# Altium PCB MCU_PCB.PcbDoc
Units mm, origin at the board's own origin, x right, y up, seen from the top; angles counter-clockwise.
Board outline 70.36 x 37.85 mm, 2 copper layers (Top Layer, Bottom Layer), stack 1.671 mm thick; 32 components, 25 nets, 136 pads, 170 vias.
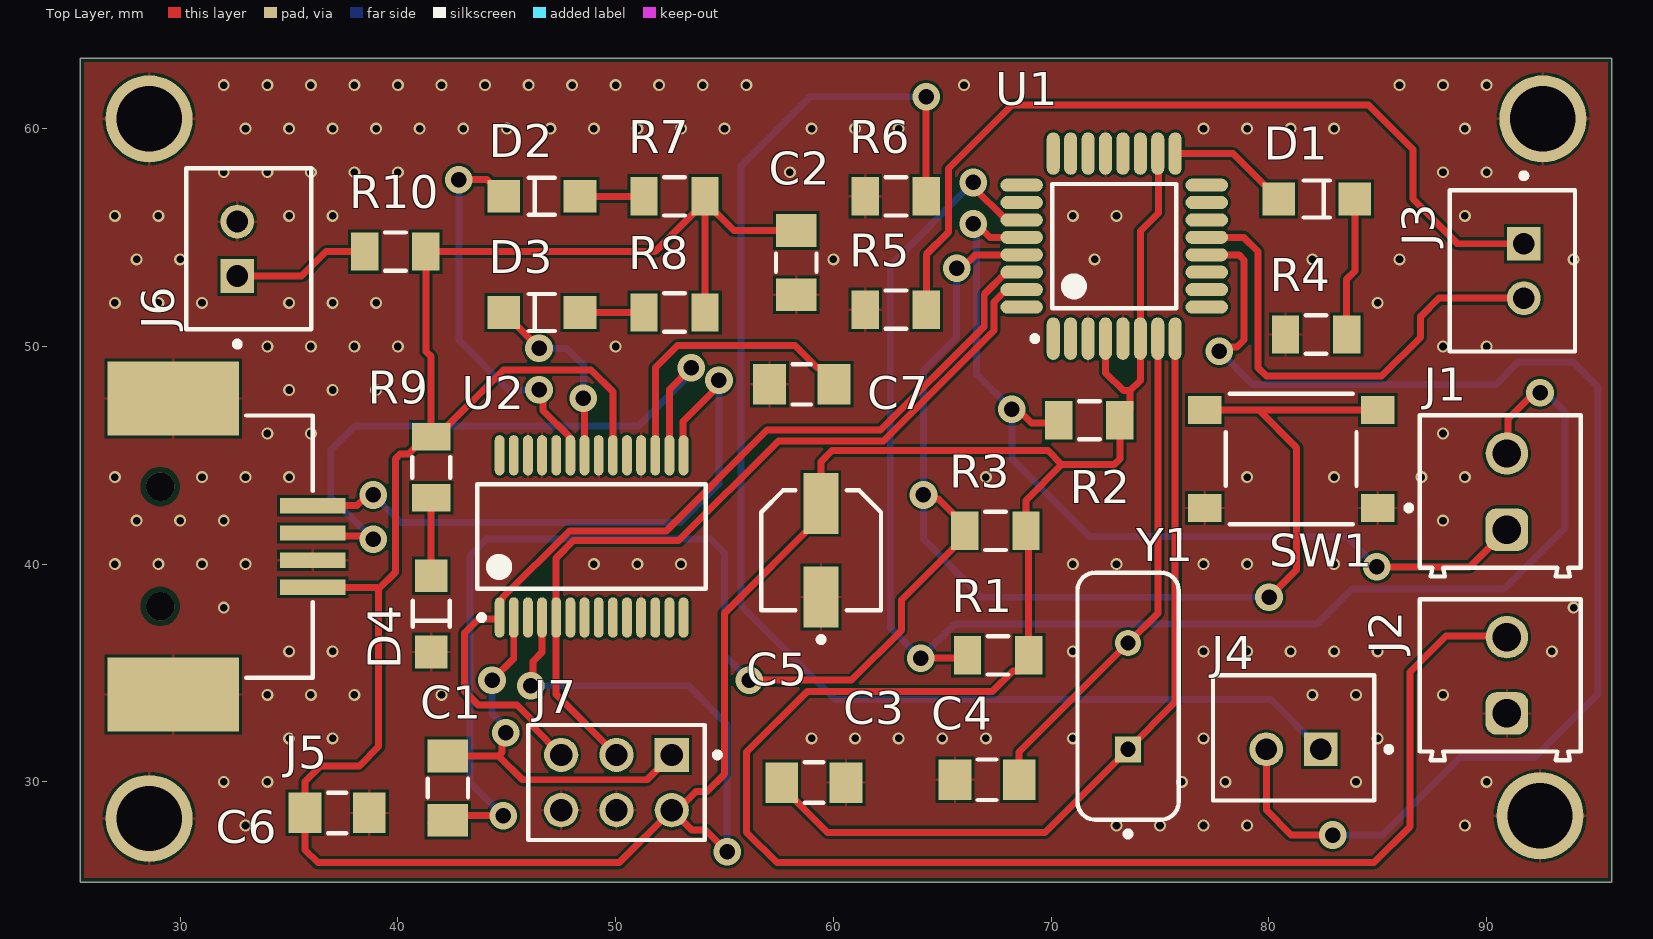
[diagram p0: Top Layer view]
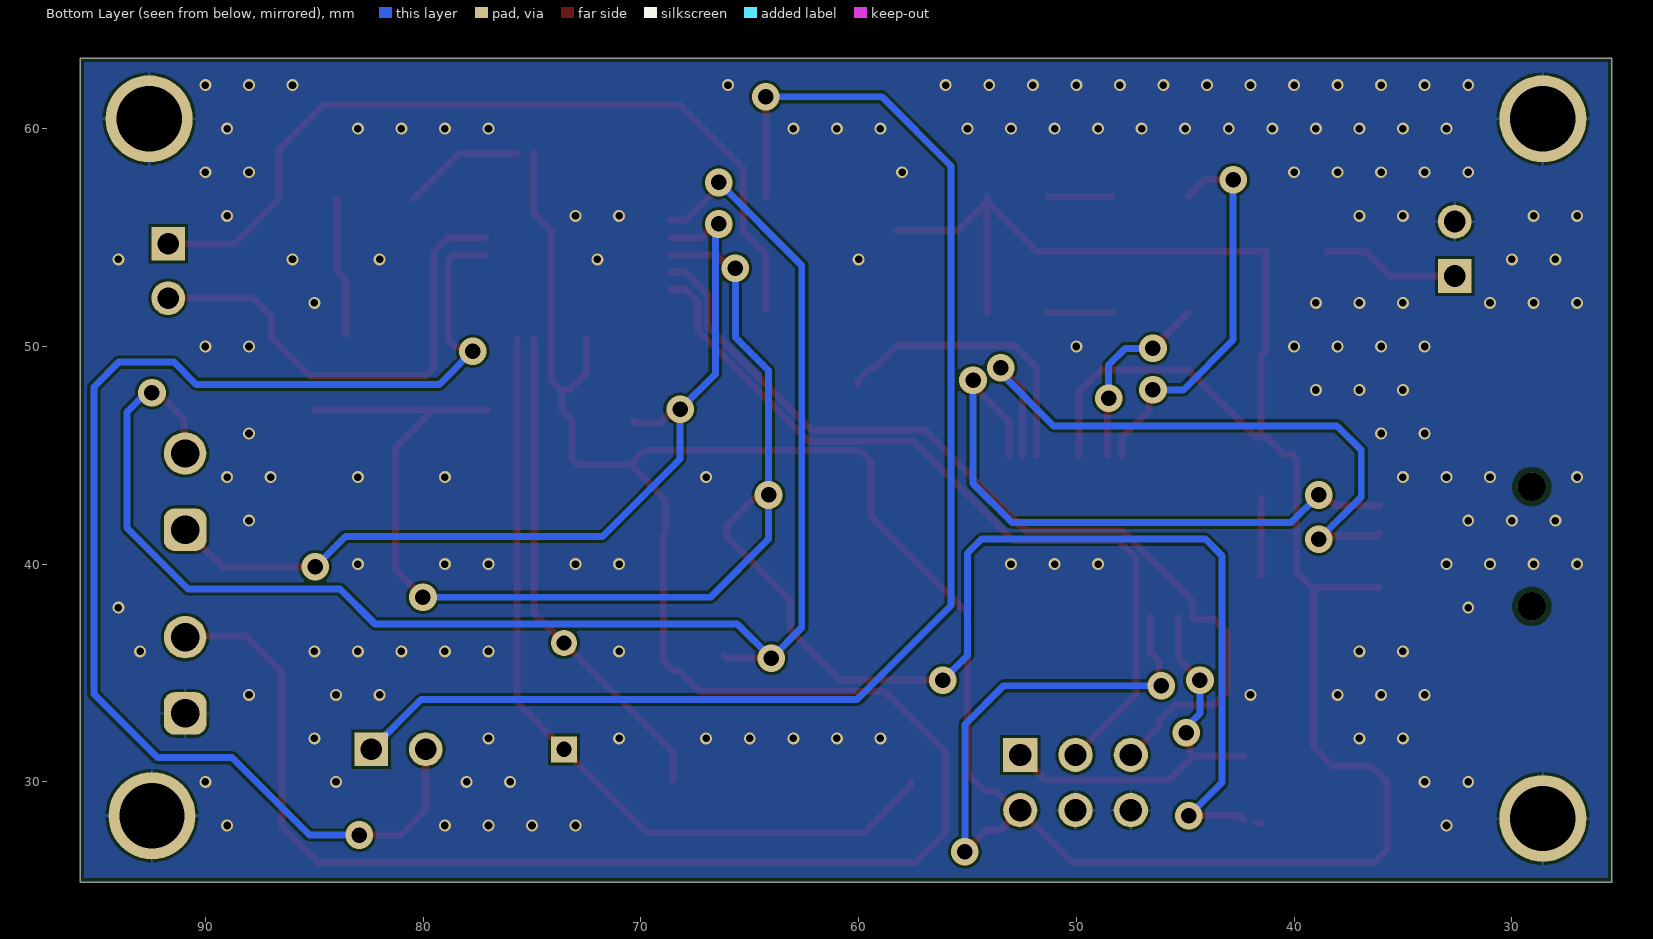
[diagram p1: Bottom Layer view, seen from below]
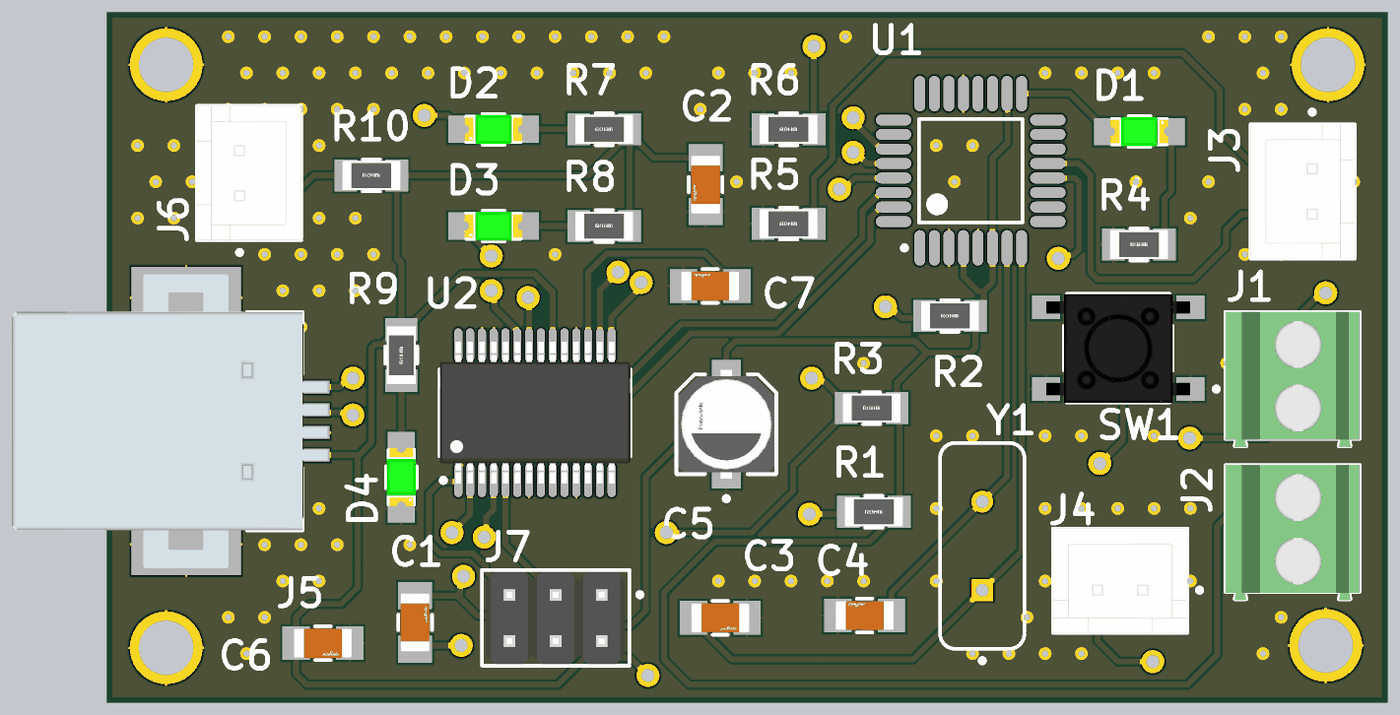
[diagram p2: 3D render of the assembled board from above, using the file's embedded part models]

## Layer stack, top to bottom
Top Solder: solder mask 0.0102, Solder Resist, Dk 3.5
Top Layer: signal copper 0.0356
Dielectric 1: dielectric 1.6, FR-4, Dk 4.8
Bottom Layer: signal copper 0.0356
Bottom Solder: solder mask 0.0102, Solder Resist, Dk 3.5

## Board outline
25.4,25.4 95.758,25.4 95.758,63.246 25.4,63.246

## Design rules (kind name [scope] priority, off if disabled: settings)
BoardOutlineClearance [All] p1: gap=0.2 ignorepadtopadclearanceinfootprint=FALSE
Clearance [All] p1: gap=0.127 ignorepadtopadclearanceinfootprint=FALSE except(0.25: Arc-Hole Track-Hole SMDPad-Hole THPad-Hole Via-Hole Fill-Hole Poly-Hole Region-Hole Text-Hole)
ComponentClearance [All] p1: gap=0.127 collisioncheckmode=3 verticalgap=0.127 showdistances=TRUE
DiffPairsRouting [All] p1: maxlimit=0.254 minlimit=0.127 mostfreqgap=0.127 toplayer_minwidth=0.127 toplayer_maxwidth=25.4 toplayer_prefwidth=0.127 bottomlayer_minwidth=0.127 bottomlayer_maxwidth=25.4 bottomlayer_prefwidth=0.127 maxuncoupledlength=12.7
Height [All] p1: minheight=0 maxheight=1816.048 prefheight=12.7
HoleSize [All] p1: absolutevalues=TRUE maxlimit=6.3 minlimit=0.3 maxpercent=80.000 minpercent=20.000
HoleToHoleClearance [All] p1: gap=0.25 allowstackedmicrovias=FALSE
MinimumAnnularRing [All] p1: minimumring=0.076
MinimumSolderMaskSliver [All] p1: minsoldermaskwidth=0
PlaneClearance [All] p1: clearance=0.127
PlaneConnect PlaneConnectPowerPads [InPadClass('PowerPads')] p1: planeconnectstyle=Direct reliefexpansion=0.508 reliefentries=4 reliefconductorwidth=0.254 reliefairgap=0.254
PlaneConnect [All] p2: pad.planeconnectstyle=Relief pad.reliefexpansion=0.3 pad.reliefentries=4 pad.reliefconductorwidth=0.127 pad.reliefairgap=0.127 via.planeconnectstyle=Direct via.reliefexpansion=0.3 via.reliefentries=4 via.reliefconductorwidth=0.127 via.reliefairgap=0.127
PolygonConnect PolygonConnectPowerPads [All vs (InPadClass('PowerPads'))] p1: connectstyle=Direct reliefconductorwidth=0.254 reliefentries=4 polygonreliefangle="90 Angle" airgapwidth=0.254
PolygonConnect [All] p2: thpad.connectstyle=Relief thpad.reliefconductorwidth=0.127 thpad.reliefentries=4 thpad.polygonreliefangle="90 Angle" thpad.airgapwidth=0.127 smdpad.connectstyle=Relief smdpad.reliefconductorwidth=0.127 smdpad.reliefentries=4 smdpad.polygonreliefangle="90 Angle" smdpad.airgapwidth=0.127 via.connectstyle=Direct via.reliefconductorwidth=0.127 via.reliefentries=4 via.polygonreliefangle="90 Angle" via.airgapwidth=0.127
RoutingVias [All] p1: holewidth=0.3 width=0.6 viastyle="Through Hole" minholewidth=0.3 minwidth=0.6 maxholewidth=0.6 maxwidth=6.6
SilkToSilkClearance [All] p1: silktosilkclearance=0
SilkToSolderMaskClearance [IsPad] p1: minsilkscreentomaskgap=0.127 clearancetoexposedcopper=TRUE
SolderMaskExpansion [All] p1: expansion=0.075 istentingtop=FALSE
Width [All] p1: maxlimit=25.4 minlimit=0.127 preferedwidth=0.127 minimp=50.000000 maximp=50.000000 favimp=50.000000
20 further rules are at their usual default settings.

## Classes and differential pairs
component class MCU: C1 C2 C3 C4 D1 J1 J2 J3 J4 R1 R2 R3 R4 R5 R6 SW1 U1 Y1
component class FTDI: C5 C6 C7 D2 D3 D4 J5 J6 J7 R7 R8 R9 R10 U2

## Components (designator, comment, footprint, x,y, rotation, side; value= is the part's Value field where it differs from the comment)
C1 "GRM31M1X1H104JA01L" FP-GRM31M-0_15-IPC_A 42.291,29.718 r90 top
C2 "GRM31M1X1H104JA01L" FP-GRM31M-0_15-IPC_A 58.293,53.848 r270 top
C3 "GRM31M1X1H104JA01L" FP-GRM31M-0_15-IPC_A 59.103,29.972 r0 top
C4 "GRM31M1X1H104JA01L" FP-GRM31M-0_15-IPC_A 67.056,30.099 r180 top
C5 "EEE1VA100SR" FP-SC-MFG 59.436,40.64 r90 top
C6 "GRM31M1X1H104JA01L" FP-GRM31M-0_15-IPC_A 37.211,28.575 r0 top
C7 "GRM31M1X1H104JA01L" FP-GRM31M-0_15-IPC_A 58.547,48.26 r180 top
D1 "HSMG-C150" FP-HSMG-C150-MFG 82.197,56.769 r180 top
D2 "HSMG-C150" FP-HSMG-C150-MFG 46.609,56.896 r0 top
D3 "HSMG-C150" FP-HSMG-C150-MFG 46.609,51.562 r0 top
D4 "HSMG-C150" FP-HSMG-C150-MFG 41.529,37.719 r90 top
J1 "691214110002" 691214110002 90.632,43.335 r90 top
J2 "691214110002" 691214110002 90.632,34.897 r90 top
J3 "B2B-XH-A(LF)(SN)" FP-B2B-XH-A_LF_SN-MFG 91.186,53.467 r270 top
J4 "B2B-XH-A(LF)(SN)" FP-B2B-XH-A_LF_SN-MFG 81.133,32.021 r180 top
J5 "62910416121" 62910416121 28.083,40.811 r270 top
J6 "B2B-XH-A(LF)(SN)" FP-B2B-XH-A_LF_SN-MFG 33.147,54.483 r90 top
J7 "M20-9980346" FP-M20-9980346-MFG 50.038,29.972 r180 top
R1 "MCR18EZPF30R0" FP-MCR18-IPC_B 67.564,35.814 r0 top
R2 "MCR18EZPF30R0" FP-MCR18-IPC_B 71.755,46.609 r0 top
R3 "MCR18EZPF30R0" FP-MCR18-IPC_B 67.441,41.529 r0 top
R4 "MCR18EZPF30R0" FP-MCR18-IPC_B 82.169,50.546 r0 top
R5 "MCR18EZPF30R0" FP-MCR18-IPC_B 62.865,51.689 r0 top
R6 "MCR18EZPF30R0" FP-MCR18-IPC_B 62.865,56.896 r0 top
R7 "MCR18EZPF30R0" FP-MCR18-IPC_B 52.705,56.896 r0 top
R8 "MCR18EZPF30R0" FP-MCR18-IPC_B 52.705,51.562 r0 top
R9 "MCR18EZPF30R0" FP-MCR18-IPC_B 41.529,44.45 r90 top
R10 "MCR18EZPF30R0" FP-MCR18-IPC_B 39.882,54.356 r0 top
SW1 "PTS645SM43SMTR92LFS" FP-PTS645SM43SMTR92LFS-MFG 81.026,44.831 r180 top
U1 "ATmega328P-AU" 32A_M 72.898,54.61 r90 top
U2 "FT232RL" FTDI-SSOP-28_M 48.895,41.275 r90 top
Y1 "FOXSLF/160-20" FOX-FOXSLF160-20 73.533,33.936 r90 top

## Footprints (in the part's own frame and the unit in brackets; to place one, negate y for a bottom-side part, rotate by r counter-clockwise, add the part's x,y. Pads: shape width x height; smd on the part's side, far side on the other; paste and mask are expansions set on the pad)
32A_M [mm] "Thin QFP, 32-Leads, Body 7x7mm, Pitch 0.8mm, IPC Low Density"
  oval 1.95x0.6 smd: 1(-4.25,2.8) 2(-4.25,2) 3(-4.25,1.2) 4(-4.25,0.4) 5(-4.25,-0.4) 6(-4.25,-1.2) 7(-4.25,-2) 8(-4.25,-2.8) 17(4.25,-2.8) 18(4.25,-2) 19(4.25,-1.2) 20(4.25,-0.4) 21(4.25,0.4) 22(4.25,1.2) 23(4.25,2) 24(4.25,2.8)
  oval 0.6x1.95 smd: 9(-2.8,-4.25) 10(-2,-4.25) 11(-1.2,-4.25) 12(-0.4,-4.25) 13(0.4,-4.25) 14(1.2,-4.25) 15(2,-4.25) 16(2.8,-4.25) 25(2.8,4.25) 26(2,4.25) 27(1.2,4.25) 28(0.4,4.25) 29(-0.4,4.25) 30(-1.2,4.25) 31(-2,4.25) 32(-2.8,4.25)
  silkscreen extent -4.37,-2.85 2.85,3.77, body extent -3.5,-3.5 3.5,3.5, height 1.2
62910416121 [mm] "USB 2.0 Type B SMT Horizontal"
  rect 0.7x3 smd: 1(1.875,8) 2(-0.625,8) 3(-1.875,8) 4(0.625,8)
  round 1.3 hole 1.3 unplated: MH1(-2.75,1) MH2(2.75,1)
  rect 3.4x6.04 smd: Shell(-6.8,1.6) Shell(6.8,1.6)
  silkscreen extent -6.02,4.95 6.02,8, body extent -8.1,-8 8.1,9.39, height 11.16
691214110002 [mm] "3.50 mm Horizontal Entry Modular, 2p"
  rrect50% 1.95x1.95 hole 1.3: 1(-1.75,-0.3)
  round 1.95 hole 1.3: 2(1.75,-0.3)
  silkscreen extent -3.9,-3.7 3.5,3.7, body extent -3.95,-3.7 3.5,3.7, height 8.55
FOX-FOXSLF160-20 [mm] "THD, 2-Leads, Body 11.35x4.65mm"
  rect 1.2x1.2 hole 0.7: 1(-2.44,0)
  round 1.2 hole 0.7: 2(2.44,0)
  silkscreen extent -6.45,-2.32 5.68,2.32, body extent -5.67,-2.32 5.68,2.33, height 3.6
FP-B2B-XH-A_LF_SN-MFG [mm]
  rect 1.55x1.55 hole 1 paste-2539.97 mask+0: 1(-1.25,0.525)
  round 1.55 hole 1 paste-2539.97 mask+0: 2(1.25,0.525)
  silkscreen extent -4.5,-2.88 3.7,2.88, body extent -3.8,-2.98 3.8,2.98, height 0.25
FP-GRM31M-0_15-IPC_A [mm]
  rect 1.506x1.858 smd paste+0 mask+0: 1(-1.476,0) 2(1.476,0)
  silkscreen extent -0.42,-0.93 0.42,0.93, body extent -2.73,-1.43 2.73,1.43, height 0.25
FP-HSMG-C150-MFG [mm]
  rect 1.5x1.5 smd paste+0 mask+0: 1(-1.75,0) 2(1.75,0)
  silkscreen extent -0.6,-0.85 0.6,0.85, body extent -2.6,-0.95 2.6,0.95, height 0.25
FP-M20-9980346-MFG [mm]
  rect 1.57x1.57 hole 1.02 paste-2539.97 mask+0: 1(-2.54,-1.27)
  round 1.57 hole 1.02 paste-2539.97 mask+0: 2(-2.54,1.27) 3(0,-1.27) 4(0,1.27) 5(2.54,-1.27) 6(2.54,1.27)
  silkscreen extent -4.76,-2.64 4.06,2.64, body extent -4.16,-2.74 4.16,2.74, height 0.25
FP-MCR18-IPC_B [mm]
  rect 1.256x1.758 smd paste+0 mask+0: 1(-1.401,0) 2(1.401,0)
  silkscreen extent -0.47,-0.88 0.47,0.88, body extent -2.28,-1.13 2.28,1.13, height 0.25
FP-PTS645SM43SMTR92LFS-MFG [mm]
  rect 1.55x1.3 smd paste+0 mask+0: 1(-3.975,2.25) 2(3.975,2.25) 3(-3.975,-2.25) 4(3.975,-2.25)
  silkscreen extent -5.53,-3 3,3, body extent -4.85,-3.1 4.85,3.1, height 0.25
FP-SC-MFG [mm]
  rect 2.8x1.6 smd paste+0 mask+0: 1(-2.15,0) 2(2.15,0)
  silkscreen extent -4.22,-2.75 2.75,2.75, body extent -3.8,-3 3.8,3, height 0.25
FTDI-SSOP-28_M [mm] "SOP, 28-Leads, Body 10.5x5.6mm, Pitch 0.65mm, IPC Low Density"
  oval 1.85x0.45 smd: 1(-3.725,4.225) 2(-3.725,3.575) 3(-3.725,2.925) 4(-3.725,2.275) 5(-3.725,1.625) 6(-3.725,0.975) 7(-3.725,0.325) 8(-3.725,-0.325) 9(-3.725,-0.975) 10(-3.725,-1.625) 11(-3.725,-2.275) 12(-3.725,-2.925) 13(-3.725,-3.575) 14(-3.725,-4.225) 15(3.725,-4.225) 16(3.725,-3.575) 17(3.725,-2.925) 18(3.725,-2.275) 19(3.725,-1.625) 20(3.725,-0.975) 21(3.725,-0.325) 22(3.725,0.325) 23(3.725,0.975) 24(3.725,1.625) 25(3.725,2.275) 26(3.725,2.925) 27(3.725,3.575) 28(3.725,4.225)
  silkscreen extent -3.85,-5.25 2.4,5.25, body extent -3.9,-5.25 3.9,5.25, height 2

## Part data
C1 C6 C7: library part CMP-06035-007547-1, "Chip Multilayer Ceramic Capacitors for General Purpose, 1206, 0.10uF, SL, +350/-1000ppm/°C, 5%, 50V", Capacitance=0.1uF, Case Code (Imperial)=1206, Case Code (Metric)=3216, Dielectric Material=Ceramic, Max Operating Temperature=125°C, Min Operating Temperature=-55°C, Temperature Coefficient=-1000ppm/°C, Tolerance=5%, Voltage=50V, Case/Package=1206, Depth=1.6mm, Dissipation Factor=0.025%, Height=1.15mm, Length=0.126inch, Mount="Surface Mount", Packaging="Tape and Reel", Termination=SMD/SMT, Thickness=0.049inch, Voltage Rating=50V, Voltage Rating (DC)=50V, Width=0.063inch
C2: library part CMP-06035-007547-1, "Chip Multilayer Ceramic Capacitors for General Purpose, 1206, 0.10uF, SL, +350/-1000ppm/°C, 5%, 50V", Capacitance=10uF, Case Code (Imperial)=1206, Case Code (Metric)=3216, Dielectric Material=Ceramic, Max Operating Temperature=125°C, Min Operating Temperature=-55°C, Temperature Coefficient=-1000ppm/°C, Tolerance=5%, Voltage=50V, Case/Package=1206, Depth=1.6mm, Dissipation Factor=0.025%, Height=1.15mm, Length=0.126inch, Mount="Surface Mount", Packaging="Tape and Reel", Termination=SMD/SMT, Thickness=0.049inch, Voltage Rating=50V, Voltage Rating (DC)=50V, Width=0.063inch
C3 C4: library part CMP-06035-007547-1, "Chip Multilayer Ceramic Capacitors for General Purpose, 1206, 0.10uF, SL, +350/-1000ppm/°C, 5%, 50V", Capacitance=22pF, Case Code (Imperial)=1206, Case Code (Metric)=3216, Dielectric Material=Ceramic, Max Operating Temperature=125°C, Min Operating Temperature=-55°C, Temperature Coefficient=-1000ppm/°C, Tolerance=5%, Voltage=50V, Case/Package=1206, Depth=1.6mm, Dissipation Factor=0.025%, Height=1.15mm, Length=0.126inch, Mount="Surface Mount", Packaging="Tape and Reel", Termination=SMD/SMT, Thickness=0.049inch, Voltage Rating=50V, Voltage Rating (DC)=50V, Width=0.063inch
C5: library part CMP-05427-000087-1, "CAP ALUM 10UF 20% 35V SMD", Capacitance=10uF, Case/Package=Radial, Leakage Current=3uA, Max Operating Temperature=85°C, Min Operating Temperature=-40°C, Package Quantity=1, Ripple Current=30mA, Tolerance=20%, Voltage=35V, Construction=Cylindrical, Contact Plating=Tin, Diameter=5mm, Height=5.4mm, Height - Seated (Max)=0.213inch, Lead Length=2.2mm, Lead Pitch=1.5mm, Length=5.5mm, Life (Hours)=2000Hour, Mount="Surface Mount", Number of Pins=2, Packaging="Tape and Reel", Radiation Hardening=No, REACH SVHC="No SVHC", Ripple Current (AC)=30mA, RoHS Compliant=Yes, Series=S, Termination=SMD/SMT, Voltage Rating=35V, Voltage Rating (DC)=35V, Width=5.3mm
D1 D3: library part CMP-2000-05061-2, "LED GREEN DIFFUSED 1206 SMD", Color="Green LED", Colour=Green, Forward Current=20mA, Forward Voltage=2.2V, Manufacturer=Broadcom, Max Junction Temp=+95°C, Power Dissipation=65mW, Reverse Voltage=5V, Temperature="-40°C to +85°C", Temperature Range High=+85°C, Temperature Range Low=-40°C, Automotive=No, Category=Diode, ComponentLink2Description=Datasheet, ComponentLink2URL=https://docs.broadcom.com/docs/AV02-0551EN, Device Class L1=Optoelectronics, Device Class L2=LEDs, Device Class L3=unset, Digikey Description="LED GREEN DIFFUSED 1206 SMD", Height=1.2mm, Ipc Land Pattern Name=DIOCP320160X55, Lead Free=Yes, Led Orientation="Top View", Luminous Intensity=15mcd, Manufacturer Part Number=HSMG-C150, Mouser Description="LED Uni-Color Green 570nm 2-Pin Chip LED T/R", Octopart=https://octopart.com/hsmg-c150-broadcom-71131304, Package=HSMG-C150, Peak Emmision Wavelength=570nm, RoHS=TRUE, Viewing Angle=170°, Wavelength=572nm
D2: library part CMP-2000-05061-2, "LED GREEN DIFFUSED 1206 SMD", Color="Red LED", Colour=Green, Forward Current=20mA, Forward Voltage=2.2V, Manufacturer=Broadcom, Max Junction Temp=+95°C, Power Dissipation=65mW, Reverse Voltage=5V, Temperature="-40°C to +85°C", Temperature Range High=+85°C, Temperature Range Low=-40°C, Automotive=No, Category=Diode, ComponentLink2Description=Datasheet, ComponentLink2URL=https://docs.broadcom.com/docs/AV02-0551EN, Device Class L1=Optoelectronics, Device Class L2=LEDs, Device Class L3=unset, Digikey Description="LED GREEN DIFFUSED 1206 SMD", Height=1.2mm, Ipc Land Pattern Name=DIOCP320160X55, Lead Free=Yes, Led Orientation="Top View", Luminous Intensity=15mcd, Manufacturer Part Number=HSMG-C150, Mouser Description="LED Uni-Color Green 570nm 2-Pin Chip LED T/R", Octopart=https://octopart.com/hsmg-c150-broadcom-71131304, Package=HSMG-C150, Peak Emmision Wavelength=570nm, RoHS=TRUE, Viewing Angle=170°, Wavelength=572nm
D4: library part CMP-2000-05061-2, "LED GREEN DIFFUSED 1206 SMD", Color="Power LED", Colour=Green, Forward Current=20mA, Forward Voltage=2.2V, Manufacturer=Broadcom, Max Junction Temp=+95°C, Power Dissipation=65mW, Reverse Voltage=5V, Temperature="-40°C to +85°C", Temperature Range High=+85°C, Temperature Range Low=-40°C, Automotive=No, Category=Diode, ComponentLink2Description=Datasheet, ComponentLink2URL=https://docs.broadcom.com/docs/AV02-0551EN, Device Class L1=Optoelectronics, Device Class L2=LEDs, Device Class L3=unset, Digikey Description="LED GREEN DIFFUSED 1206 SMD", Height=1.2mm, Ipc Land Pattern Name=DIOCP320160X55, Lead Free=Yes, Led Orientation="Top View", Luminous Intensity=15mcd, Manufacturer Part Number=HSMG-C150, Mouser Description="LED Uni-Color Green 570nm 2-Pin Chip LED T/R", Octopart=https://octopart.com/hsmg-c150-broadcom-71131304, Package=HSMG-C150, Peak Emmision Wavelength=570nm, RoHS=TRUE, Viewing Angle=170°, Wavelength=572nm
J1 J2: library part CMP-1502-02464-2, Color="Blue, Green", Current=10A, Max Operating Temperature=105°C, Min Operating Temperature=-40°C, Voltage=300V, Contact Material=Brass, Contact Plating="Brass, Tin", Current Rating=10A, Height=8.7mm, Housing Material=Nylon, Lead Pitch=3.5mm, Length=7.4mm, Mount="Through Hole", NexarPartId=18818288, Number of Contacts=2, Number of Levels=1, Number of Pins=2, Number of Positions Per Level=2, Number of Rows=1, Packaging=Box, Pitch=3.5052mm, Plating="Brass, Steel", REACH SVHC=Unknown, RoHS=Compliant, Stripping Length=-6mm, Termination=Screw, Voltage Rating=300V, Width=7.9mm, Wire Gauge (Max)=24AWG, Wire Gauge (Min)=16AWG, Wire/Cable Gauge=24AWG
J3 J4 J6: library part CMP-2000-05888-3, "CONN HEADER VERT 2POS 2.5MM", Color=Natural, Contact Resistance=20mR, Current Rating=3A, Housing Color=White, Insulation Resistance=1GR, Max Operating Temperature=85°C, Max Voltage Rating (AC)=250V, Min Operating Temperature=-25°C, Connector Type="Male Pin", Contact Material=Brass, Contact Plating=Tin, Contact Type="Male Pin", Depth=5.75mm, Fastening Type=Detent, Housing Material=Polyamide, Lead Free="Lead Free", Lead Pitch=2.5mm, Length=7.4mm, Max Current Rating=3A, Max Voltage Rating (DC)=250V, Mount="Through Hole", Number of Contacts=2, Number of Positions=2, Number of Rows=1, Orientation=Straight, Packaging=Bulk, Pitch=2.5mm, REACH SVHC="No SVHC", Series=XH, Termination=Solder, Voltage Rating=250V, Voltage Rating (AC)=250V, Wire/Cable Gauge=22AWG
J5: library part CMP-1502-03244-2, Contact Resistance=20mΩ, Current Rating=1.5A, Insulation Resistance=1GΩ, Max Operating Temperature=105°C, Min Operating Temperature=-40°C, Operating Supply Voltage=30V, Connector Type=USB, Contact Plating=Gold, Features=Shielded, Gender=Receptacle, Lead Free="Lead Free", Length=16mm, Mount="Horizontal, Surface Mount", NexarPartId=19991172, Number of Contacts=4, Number of Pins=4, Orientation=Horizontal, Packaging="Tape and Reel", REACH SVHC=Unknown, RoHS=Compliant, Termination=SMD/SMT, USB Standard="USB 2.0"
J7: library part CMP-2000-06636-2, "CONN HEADER VERT 6POS 2.54MM", Current Rating=3A, Manufacturer=Harwin, Temperature="-40°C to +105°C", Temperature Range High=+105°C, Temperature Range Low=-40°C, Automotive=No, Category=Conn, ComponentLink2Description=Datasheet, ComponentLink2URL=https://cdn.harwin.com/pdfs/M20-998.pdf, Conn Gender=Male, Conn Orientation=Vertical, Contact Material=Tin,Nickel, Device Class L1=Connectors, Device Class L2="Headers and Wire Housings", Device Class L3=unset, Digikey Description="CONN HEADER VERT 6POS 2.54MM", Height=8.99mm, Lead Free=Yes, Manufacturer Part Number=M20-9980346, Mouser Description="2.54mm (0.1\") Pitch DIL Vertical PC Tail Pin Header, 6.1mm mating pin height, tin, 3+3 contacts", Number of Contacts=6, Number of Rows=2, Octopart=https://octopart.com/m20-9980346-harwin-5436545, Package=M20-9980346, Pitch=2.54mm, RoHS=TRUE
R1 R2 R3 R7 R8 R9: library part CMP-08839-012195-1, "Thick Film Chip Resistor, 1206, 30Ω, 1%, 100ppm/°C, 0.25W, 200V", Case Code (Imperial)=1206, Case Code (Metric)=3216, Max Power Dissipation=250mW, Package Quantity=5000, Resistance=1k, Resistor Type="Thick Film", Temperature Coefficient=100ppm/°C, Tolerance=1%, Voltage Rating (DC)=200V, Case/Package=1206, Features="Automotive AEC-Q200", Height=0.026inch, Lead Free="Lead Free", Length=0.126inch, Number of Terminations=2, Packaging="Tape and Reel", RoHS Compliant=Yes, Series=MCR18, Width=0.063inch
R4 R5 R6 R10: library part CMP-08839-012195-1, "Thick Film Chip Resistor, 1206, 30Ω, 1%, 100ppm/°C, 0.25W, 200V", Case Code (Imperial)=1206, Case Code (Metric)=3216, Max Power Dissipation=250mW, Package Quantity=5000, Resistance=330, Resistor Type="Thick Film", Temperature Coefficient=100ppm/°C, Tolerance=1%, Voltage Rating (DC)=200V, Case/Package=1206, Features="Automotive AEC-Q200", Height=0.026inch, Lead Free="Lead Free", Length=0.126inch, Number of Terminations=2, Packaging="Tape and Reel", RoHS Compliant=Yes, Series=MCR18, Width=0.063inch
SW1: library part CMP-2000-05160-2, "SWITCH TACTILE SPST-NO 0.05A 12V", Case/Package=SMD/SMT, Color=Black, Contact Resistance=100mR, Current Rating=50mA, Max Operating Temperature=60°C, Max Voltage Rating (DC)=12V, Min Operating Temperature=-20°C, Operating Force=160gf, Package Quantity=1, Actuator Length=0.85mm, Actuator Material=Nylon, Actuator Type=Standard, Contact Material=Silver, Contact Plating=Silver, Depth=9mm, Illumination Type=Non-Illuminated, Lead Free="Lead Free", Length=6mm, Max Current Rating=50mA, Mechanical Life=100000Cycles, Mount="Surface Mount", Orientation=Straight, Packaging="Tape and Reel", REACH SVHC="No SVHC", Switch Function=Off-Mom, Termination="Gull Wing", Throw Configuration=SPST, Voltage Rating (DC)=12V
U1: library part CMP-0095-00269-2, "8-bit AVR Microcontroller, 32KB Flash, 1KB EEPROM, 2KB SRAM, 32-pin TQFP, Industrial Grade (-40°C to 85°C)", Code_JEDEC=MS-026-ABA, ComponentLink1Description="Manufacturer URL", ComponentLink1URL=http://www.atmel.com/, ComponentLink2Description="ATmega48A/48PA/88A/88PA/168A/168PA/328/328P Datasheet", ComponentLink2URL=http://www.atmel.com/dyn/resources/prod_documents/doc8271.pdf, ComponentLink3Description="ATmega48A/48PA/88A/88PA/168A/168PA/328/328P Summary", ComponentLink3URL=http://www.atmel.com/dyn/resources/prod_documents/8271S.pdf, DatasheetVersion="revD, May-2011", PackageDescription="32-Lead, 7x7x1.0 mm Body, 0.8mm Lead Pitch, Thin Profile Plastic Quad Flat Package (TQFP)", PackageReference=32A, PackageVersion="revC, Oct-2010", RevisionNote="DatasheetVersion & PackageVersion updated. URLs added."
U2: library part CMP-2000-05029-1, "IC USB FS SERIAL UART 28-SSOP", Manufacturer=FTDI, Maximum Operating Temperature=+85degC, Minimum Operating Temperature=-40degC, Package Type=SSOP, Datasheet URL=http://datasheet.octopart.com/FT232RL-FTDI-datasheet-120501.pdf, Datasheet Version="Rev. 1.04, 02/2006", Dimensions=10.2x5.3x1.75mm, Height=1.75mm, Length=10.2mm, Manufacturer URL=http://www.ftdichip.com/, Maximum Data Rate=3MBd, Mounting Type=SurfaceMount, Number of Channels per Chip=1, Pin Count=28, Receive FIFO=256B, Transmit FIFO=128B, Width=5.3mm
Y1: library part CMP-1749-00003-1, "Resistance Weld Thru-Hole Crystal, 16 MHz, -20 to 70 degC, 2-Pin THD, RoHS, Bulk", Case\Package=Axial, Frequency=16MHz, Max Operating Temperature="155 degC", Min Operating Temperature="-55 degC", Package Quantity=200, Power Rating="250 mW", Resistance="221 kohm", Tolerance=1%, Voltage Rating="250 V", ComponentLink1Description="Manufacturer URL", ComponentLink1URL=http://www.foxonline.com/, ComponentLink2Description=Datasheet, ComponentLink2URL=http://www.foxonline.com/pdfs/hc49slf.pdf, DatasheetVersion=Mar-15, Length="0.248 inch", Mount="Through Hole", PackageDescription="2-Pin Through Hole Device, Body 11.35 x 4.65 mm", PackageReference=FOXSLF160-20, Packaging=Bulk, RoHSCompliant=true

## Free pads (board coordinates)
  round 4 hole 3: 6(92.583,60.452) 7(92.456,28.448) 8(28.575,60.452) 9(28.575,28.321)

## Via types
v1: diameter 0.55, hole 0.35, Top Layer to Bottom Layer, 144 vias
v2: diameter 1.27, hole 0.711, Top Layer to Bottom Layer, 26 vias

## Nets (pads, with @x,y where several pads share a name; then routed paths per layer and width w, separated by ;. In a path a pad name is that pad's centre, name@x,y a point inside that pad or via, vN(x,y) a via of type N, cw(c..) or ccw(c..) an arc to the next point about the centre after c; other vN are vias at no path point)
+5V: C2.1 C5.2 C6.1 J2.2 J5.1 J7.2 R1.2 R2.2 R3.2 R7.2 R8.2 R9.2 R10.2 U1.4 U1.6 U1.18 U2.4 U2.20 | length 235.1
  Top Layer w0.32: J5.1 39.042,38.936 39.116,38.862 ; v2(46.101,34.417) 46.197,34.513 46.197,35.532 46.62,35.955 U2.4 ; U2.20 49.87,47.92 48.862,48.928 44.857,48.928 41.78,45.851 R9.2 ; R8.2 R7.2@54.106,56.645 ; R7.2 R7.2@54.106,56.645 ; v2(55.118,26.797) 54.13,27.785 53.495,27.785 J7.2 ; C2.1 55.427,55.324 R7.2@54.106,56.645 ; U1.4 72.498,48.787 73.315,47.97 73.624,47.97 ; U1.18 74.93,58.828 74.93,56.134 74.098,55.302 U1.6 74.098,48.444 73.624,47.97 ; J2.2 90.876,36.703 88.138,36.703 86.487,35.052 86.487,27.94 84.836,26.289 57.404,26.289 56.007,27.686 56.007,31.369 58.801,34.163 67.314,34.163 68.246,35.095 68.497,35.095 68.965,35.563 R1.2 68.965,41.406 R3.2 68.842,42.934 70.485,44.577 ; 39.116,38.862 39.116,31.623 38.227,30.734 36.449,30.734 35.735,30.02 C6.1 35.735,26.876 36.322,26.289 50.165,26.289 J7.2 ; 39.116,38.862 39.878,39.624 39.878,44.831 40.104,45.057 40.484,45.057 41.278,45.851 R9.2 ; R9.2 41.529,49.53 41.283,49.776 R10.2 51.817,54.356 R7.2@54.106,56.645 ; J7.2 52.843,28.702 53.699,29.558 54.196,29.558 54.991,30.353 54.991,37.745 59.436,42.19 C5.2 59.436,44.704 59.944,45.212 69.85,45.212 70.485,44.577 ; 70.485,44.577 72.898,44.577 73.156,44.835 R2.2 73.624,47.077 73.624,47.97
  Bottom Layer w0.32: v2(46.101,34.417) 53.34,34.417 55.118,32.639 v2(55.118,26.797)
DTR: C1.2 J7.1 U2.2 | length 18.4
  Top Layer w0.32: C1.2 44.625,31.194 ; v2(44.323,34.671) 45.32,35.668 U2.2 ; v2(44.958,32.258) 44.776,32.076 44.776,31.346 44.625,31.194 ; J7.1 51.435,30.099 45.72,30.099 44.625,31.194
  Bottom Layer w0.32: v2(44.323,34.671) 44.323,33.15 44.958,32.515 v2(44.958,32.258)
GND: C2.2 C3.2 C4.2 C5.1 C6.2 C7.2 D4.1 J2.1 J5.4 J5.Shell J6.2 J7.4 J7.6 pad.6 pad.7 pad.8 pad.9 R4.1 R5.1 R6.1 SW1.1 SW1.2 U1.3 U1.5 U1.21 U2.7 U2.11 U2.18 U2.21 U2.25 U2.26
  other v1: 33,28 73,28 75,28 77,28 79,28 89,28 32,30 34,30 76,30 78,30 84,30 90,30 35,32 37,32 59,32 61,32 63,32 65,32 67,32 71,32 77,32 85,32 34,34 36,34 38,34 42,34 82,34 84,34 88,34 35,36 37,36 71,36 77,36 79,36 81,36 83,36 85,36 93,36 32,38 94,38 27,40 29,40 31,40 33,40 49,40 51,40 53,40 71,40 73,40 77,40 79,40 83,40 28,42 30,42 32,42 88,42 27,44 31,44 33,44 35,44 67,44 79,44 83,44 87,44 89,44 34,46 36,46 88,46 35,48 37,48 39,48 34,50 36,50 38,50 40,50 50,50 88,50 90,50 27,52 29,52 31,52 35,52 37,52 39,52 85,52 28,54 30,54 60,54 72,54 82,54 86,54 94,54 27,56 29,56 35,56 37,56 71,56 73,56 89,56 32,58 34,58 36,58 38,58 40,58 58,58 88,58 90,58 33,60 35,60 37,60 39,60 41,60 43,60 45,60 47,60 49,60 51,60 53,60 55,60 59,60 61,60 63,60 77,60 79,60 81,60 83,60 89,60 32,62 34,62 36,62 38,62 40,62 42,62 44,62 46,62 48,62 50,62 52,62 54,62 56,62 66,62 86,62 88,62 90,62
NetC1_1: C1.1 R3.1 SW1.3 SW1.4 U1.29 | length 101.5
  Top Layer w0.32: C1.1@41.529,28.115 C1.1@41.705,28.115 ; C1.1 42.497,28.448 v2(44.831,28.448) ; v2(56.134,34.671) 60.833,34.671 63.119,36.957 63.119,38.357 66.04,41.278 R3.1 66.04,41.78 64.822,42.998 64.317,42.998 v2(64.135,43.18) ; v2(65.659,53.594) 65.916,53.594 66.532,54.21 U1.29 ; SW1.4 79.538,47.081 ; v2(80.01,38.481) 81.28,39.751 81.28,45.339 79.538,47.081 ; SW1.3 79.538,47.081
  Bottom Layer w0.32: v2(44.831,28.448) 43.307,29.972 43.307,40.386 44.069,41.148 54.356,41.148 54.991,40.513 54.991,35.814 v2(56.134,34.671) ; v2(65.659,53.594) 65.659,50.419 64.135,48.895 v2(64.135,43.18) 64.135,41.148 66.802,38.481 v2(80.01,38.481)
NetC3_1: C3.1 U1.8 Y1.1 | length 38.3
  Top Layer w0.32: C3.1 57.627,29.796 59.736,27.686 69.723,27.686 Y1.1 75.698,33.661 U1.8
NetC4_1: C4.1 U1.7 Y1.2 | length 22.9
  Top Layer w0.32: C4.1 68.532,31.375 Y1.2 74.898,37.741 U1.7
NetC7_1: C7.1 U2.17 | length 13.5
  Top Layer w0.32: U2.17 51.82,49.026 52.832,50.038 58.245,50.038 59.254,49.029 59.43,49.029 60.023,48.436 C7.1
NetD1_1: D1.1 R4.2 | length 6.4
  Top Layer w0.32: R4.2 83.566,50.55 83.566,53.086 83.947,53.467 D1.1
NetD1_2: D1.2 U1.17 | length 5.6
  Top Layer w0.32: U1.17 78.356,58.86 D1.2
NetD2_1: D2.1 U2.23 | length 18
  Top Layer w0.32: v2(42.799,57.658) 44.097,57.658 D2.1 ; v2(46.482,48.006) 46.664,47.824 46.664,47.062 47.895,45.831 47.895,45.025 U2.23
  Bottom Layer w0.32: v2(42.799,57.658) 42.799,50.292 45.085,48.006 v2(46.482,48.006)
NetD2_2: D2.2 R7.1 | length 2.9
  Top Layer w0.32: D2.2 R7.1
NetD3_1: D3.1 U2.22 | length 8.8
  Top Layer w0.32: D3.1 46.482,49.939 v2(46.482,49.911) ; v2(48.514,47.625) 48.57,47.569 U2.22
  Bottom Layer w0.32: v2(46.482,49.911) 47.752,49.911 48.514,49.149 v2(48.514,47.625)
NetD3_2: D3.2 R8.1 | length 2.9
  Top Layer w0.32: D3.2 R8.1
NetD4_2: D4.2 R9.1 | length 3.6
  Top Layer w0.32: D4.2 R9.1
NetJ3_1: J3.1 R5.2 | length 38.5
  Top Layer w0.32: R5.2 64.266,54.233 65.278,55.245 65.278,58.166 68.199,61.087 84.582,61.087 86.614,59.055 86.614,56.769 88.666,54.717 J3.1
NetJ3_2: J3.2 U1.13 | length 22.4
  Top Layer w0.32: U1.13 78.848,55.01 79.502,54.356 79.502,49.022 79.883,48.641 85.18,48.641 86.958,50.419 86.958,51.365 87.81,52.217 J3.2
NetJ4_1: J4.1 R6.2 | length 64
  Top Layer w0.32: v2(64.262,61.468) 64.262,56.9 R6.2
  Bottom Layer w0.32: v2(64.262,61.468) 58.928,61.468 55.753,58.293 55.753,38.1 60.071,33.782 80.097,33.782 J4.1
NetJ4_2: J4.2 U1.12 | length 61.1
  Top Layer w0.32: U1.12 78.632,54.21 78.867,53.975 78.867,50.292 78.541,49.966 77.906,49.966 v2(77.724,49.784) ; J4.2 79.883,28.702 81.026,27.559 v2(82.931,27.559)
  Bottom Layer w0.32: v2(77.724,49.784) 79.248,48.26 90.424,48.26 91.44,49.276 93.98,49.276 95.123,48.133 95.123,34.036 92.202,31.115 88.773,31.115 85.217,27.559 v2(82.931,27.559)
NetJ5_2: J5.2 U2.16 | length 30.5
  Top Layer w0.32: J5.2 36.227,41.292 38.718,41.292 v2(38.862,41.148) ; U2.16 52.47,48.025 v2(53.467,49.022)
  Bottom Layer w0.32: v2(38.862,41.148) 36.915,43.095 36.915,45.242 38.028,46.355 51.054,46.355 53.467,48.768 v2(53.467,49.022)
NetJ5_3: J5.3 U2.15 | length 29
  Top Layer w0.32: J5.3 38.111,42.686 38.605,43.18 v2(38.862,43.18) ; U2.15 53.095,45.025 53.095,46.549 54.744,48.198 v2(54.744,48.455)
  Bottom Layer w0.32: v2(38.862,43.18) 40.132,41.91 52.959,41.91 54.744,43.695 v2(54.744,48.455)
NetJ6_1: J6.1 R10.1 | length 6.3
  Top Layer w0.32: J6.1 35.58,53.233 36.703,54.356 R10.1
RXI: J7.3 U1.31 U2.5 | length 37.4
  Top Layer w0.32: J7.3 47.27,34.01 U2.5 47.27,40.292 48.06,41.082 52.894,41.082 57.471,45.659 62.305,45.659 67.376,50.73 67.376,52.043 67.943,52.61 U1.31
SCL: J1.1 R2.1 U1.28 | length 42
  Top Layer w0.32: v2(66.421,55.626) 66.577,55.626 67.193,55.01 U1.28 ; v2(68.199,47.117) 68.456,47.117 69.091,46.482 70.227,46.482 R2.1 ; v2(84.963,39.878) 89.225,39.878 J1.1
  Bottom Layer w0.32: v2(66.421,55.626) 66.581,55.466 66.581,48.735 v2(68.199,47.117) 68.199,44.831 71.755,41.275 83.566,41.275 v2(84.963,39.878)
SDA: J1.2 R1.1 U1.27 | length 71.8
  Top Layer w0.32: v2(64.008,35.687) 66.036,35.687 R1.1 ; v2(66.421,57.531) 66.421,57.332 67.943,55.81 U1.27 ; J1.2 90.993,45.146 90.993,46.673 92.199,47.879 v2(92.456,47.879)
  Bottom Layer w0.32: v2(66.421,57.531) 62.611,53.721 62.611,37.084 v2(64.008,35.687) 65.584,37.263 82.221,37.263 83.82,38.862 90.805,38.862 93.599,41.656 93.599,46.993 92.713,47.879 v2(92.456,47.879)
TXO: J7.5 U1.30 U2.1 | length 42.3
  Top Layer w0.32: U2.1@44.67,37.541 44.61,37.481 43.704,37.481 43.053,36.83 43.053,34.163 43.688,33.528 45.466,33.528 46.172,32.822 46.172,32.568 J7.5 ; U2.1 44.67,38.285 44.808,38.423 44.808,38.462 47.875,41.529 52.324,41.529 56.95,46.155 62.169,46.155 66.929,50.915 66.929,52.396 67.943,53.41 U1.30
pads on no net: J5.MH1 J5.MH2 U1.1 U1.2 U1.9 U1.10 U1.11 U1.14 U1.15 U1.16 U1.19 U1.20 U1.22 U1.23 U1.24 U1.25 U1.26 U1.32 U2.3 U2.6 U2.8 U2.9 U2.10 U2.12 U2.13 U2.14 U2.19 U2.24 U2.27 U2.28

## Polygon pours and split planes (outlines as drawn)
GND on Bottom Layer "GND" (solid, pour order 0): 25.4,63.246 95.758,63.246 95.758,25.4 25.4,25.4
GND on Top Layer "GND" (solid, pour order 1): 25.4,63.246 95.504,63.246 95.631,63.373 95.758,63.246 95.758,25.527 25.4,25.527

## Silkscreen, mask and mechanical layers (free items; w line width, h text height)
Board:
  the board outline again, w0.2